# Altium PCB PCB6.PcbDoc
Units mm, origin at the board's own origin, x right, y up, seen from the top; angles counter-clockwise.
Board outline 25 x 40 mm, 2 copper layers (Top Layer, Bottom Layer); 23 components, 19 nets, 85 pads, 2 vias.
Unrouted connection lines stored in the file: 48.
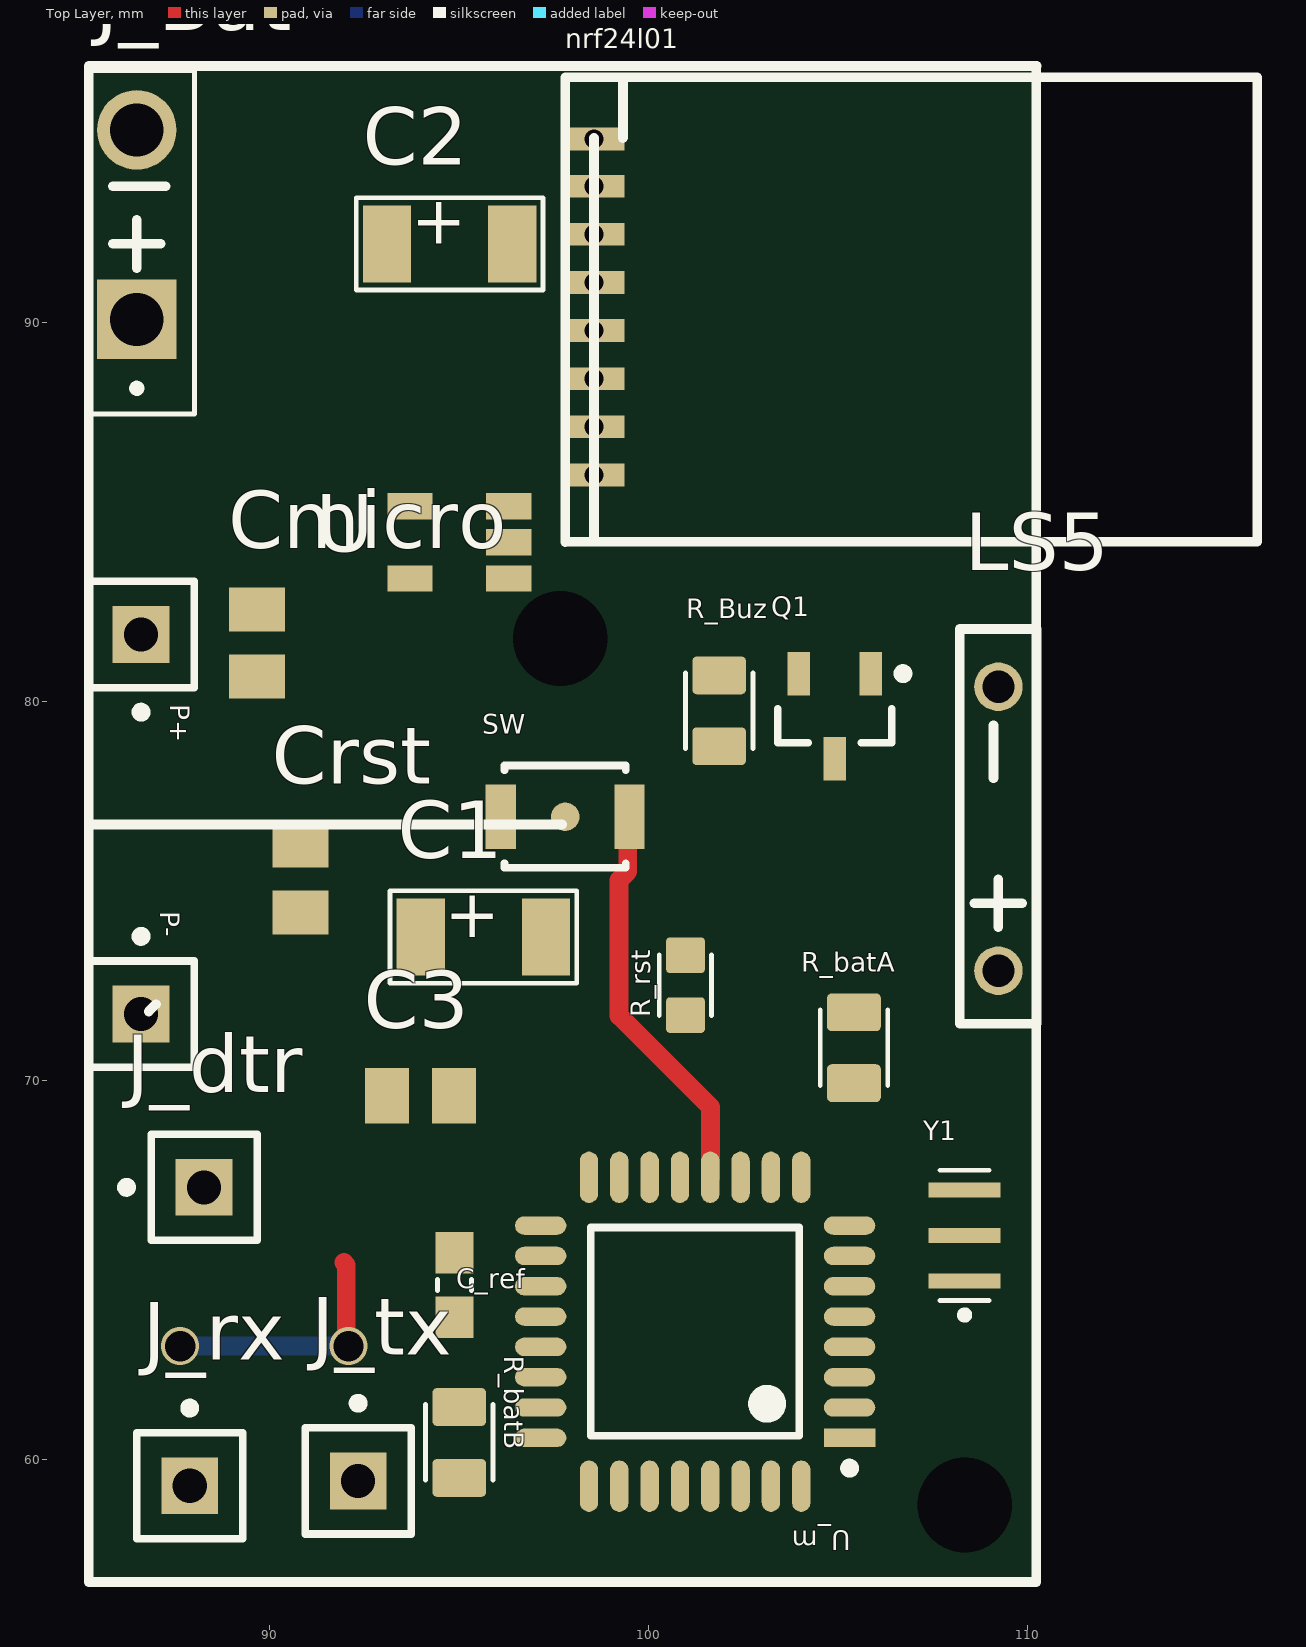
[diagram p0: Top Layer view]
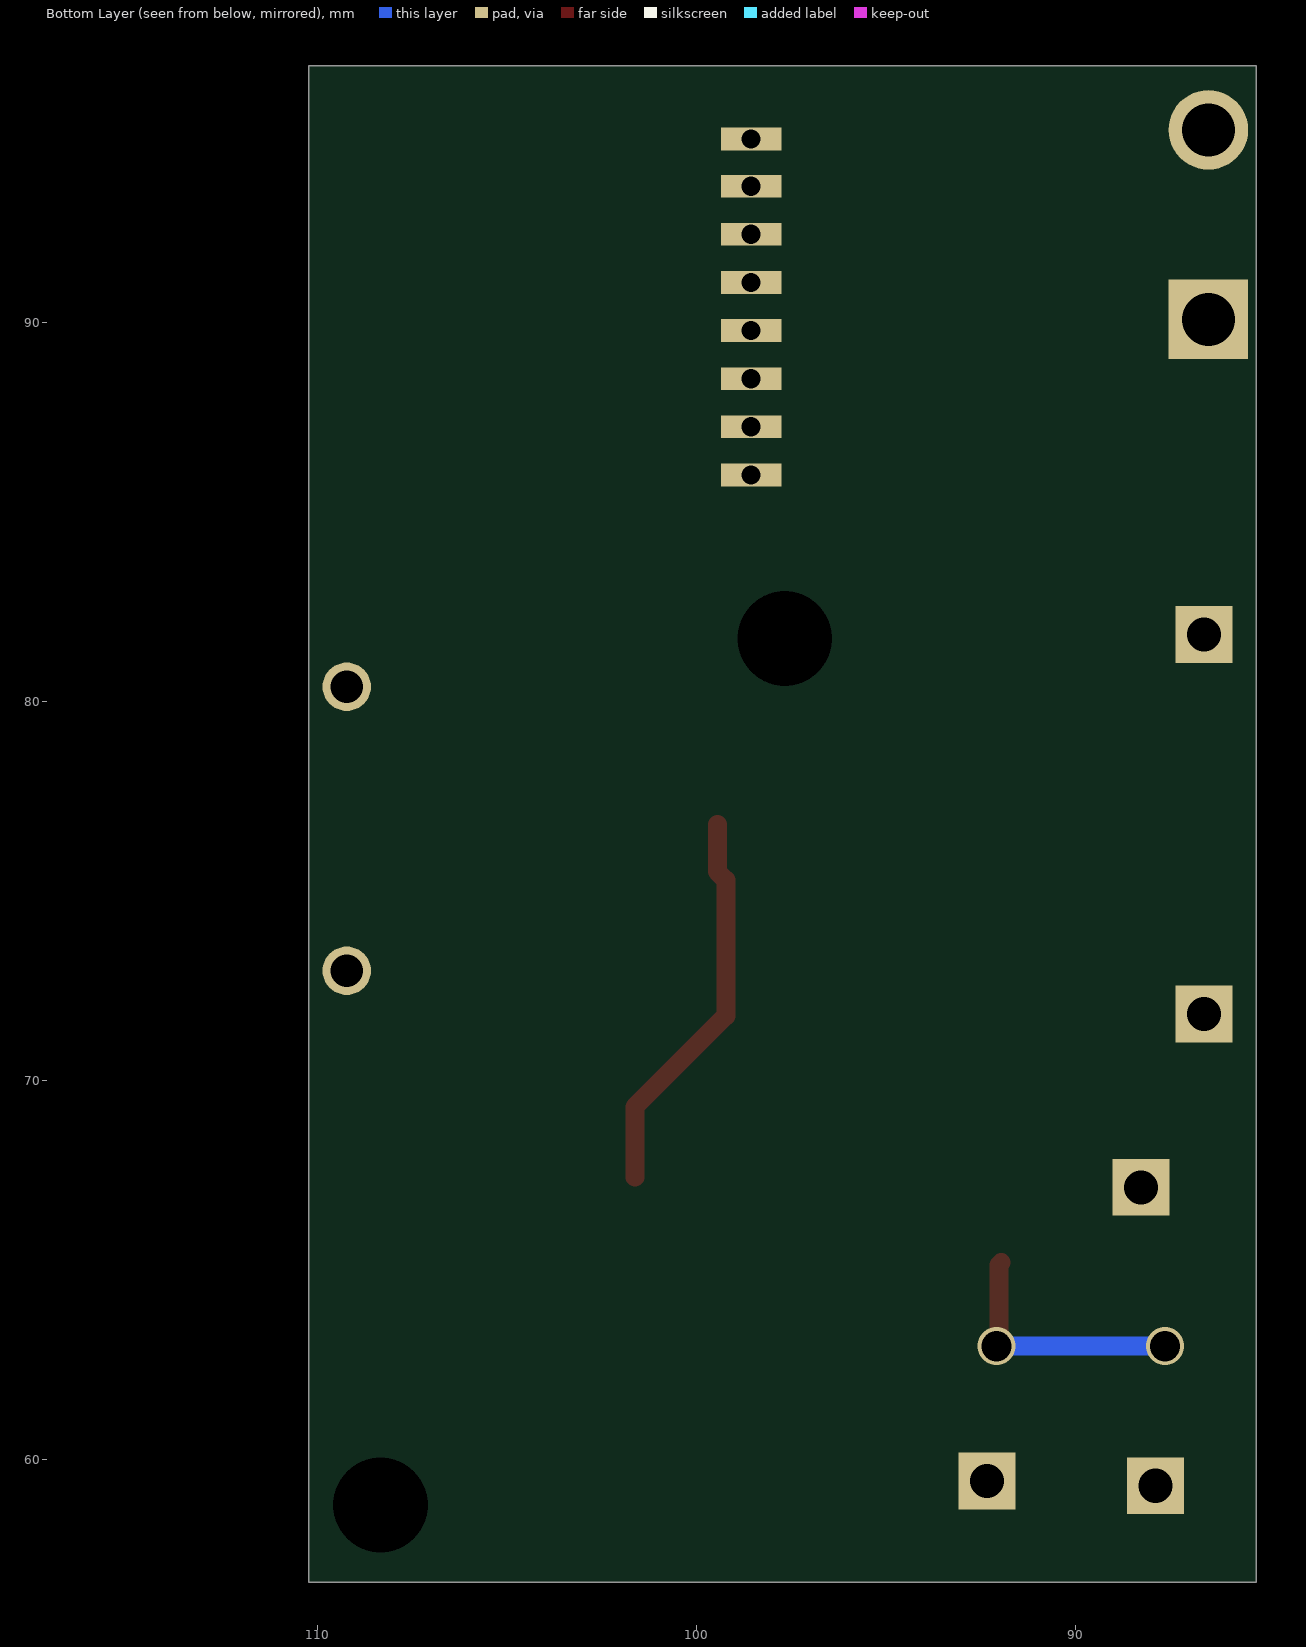
[diagram p1: Bottom Layer view, seen from below]

## Layer stack, top to bottom
Top Solder: solder mask 0.0102, Solder Resist, Dk 3.5
Top Layer: signal copper 0.0356
Dielectric 1: dielectric 0.32, FR-4, Dk 4.8
Bottom Layer: signal copper 0.0356
Bottom Solder: solder mask 0.0102, Solder Resist, Dk 3.5

## Board outline
85.217,56.769 85.217,96.769 110.217,96.769 110.217,56.769

## Design rules (kind name [scope] priority, off if disabled: settings)
Clearance [All] p1: gap=0.254 ignorepadtopadclearanceinfootprint=FALSE except(0: Arc-Hole Track-Hole SMDPad-Hole THPad-Hole Via-Hole Fill-Hole Poly-Hole Region-Hole Text-Hole)
PolygonConnect [All] p1: connectstyle=Relief reliefconductorwidth=0.254 reliefentries=4 polygonreliefangle="90 Angle" airgapwidth=0.254
RoutingVias [All] p1: holewidth=0.5 width=0.7 viastyle="Through Hole" minholewidth=0.8 minwidth=1 maxholewidth=0.5 maxwidth=0.8
SolderMaskExpansion [All] p1: expansion=0.102 istentingtop=FALSE
Width [All] p1: maxlimit=1 minlimit=0.254 preferedwidth=0.5
30 further rules are at their usual default settings.

## Components (designator, comment, footprint, x,y, rotation, side; value= is the part's Value field where it differs from the comment)
C1 "10uf" CT1206 95.631,73.787 r0 top
C2 "10uf" CT1206 94.742,92.075 r0 top
C3 "0.1uf" CAPC2012X94N 93.971,69.596 r0 top
C_ref "0.1uf" CAPC1608X90 94.869,64.604 r90 top
Cmicro "0.1uf" CAPC2012X94N 89.662,81.543 r90 top
Crst "0.1uf" CAPC2012X94N 90.805,75.32 r90 top
J_Bat "KF301-2P" HANDSON_KF301-2P 86.487,92.583 r90 top
J_dtr "Socket" PIN1 88.265,67.183 r90 top
J_rx "Socket" PIN1 87.884,59.309 r0 top
J_tx "Socket" PIN1 92.329,59.436 r0 top
LS5 "PS1240P02BT" XDCR_PS1240P02BT 109.093,76.835 r90 top
nrf24l01 "SMD" NRF24L01 97.79,94.869 r0 top
P+ "Plug" PIN1 86.6,81.769 r180 top
P- "Plug" PIN1 86.6,71.755 r0 top
Q1 "QNPN" SOT-23B_N 104.902,79.611 r270 top
R_batA "470 K" RESC2012X65N 105.41,70.866 r90 top
R_batB "1 M" RESC2012X65N 94.996,60.452 r90 top
R_Buz "100" RESC2012X65N 101.854,79.756 r90 top
R_rst "10K" RESC1608X50N 100.965,72.517 r270 top
SW "B3U-1000P-B" Omron_0_MFG 97.79,76.962 r0 top
U "3.3reg" SOT-23-5 94.996,84.201 r90 top
U_m "ATMEGA328PB-AUR" Microchip_C04-074_IPC_C 101.219,63.373 r180 top
Y1 "clock" OSC_CSTCE8M00G52-R0 108.331,65.913 r90 top

## Footprints (in the part's own frame and the unit in brackets; to place one, negate y for a bottom-side part, rotate by r counter-clockwise, add the part's x,y. Pads: shape width x height; smd on the part's side, far side on the other; paste and mask are expansions set on the pad)
CAPC1608X90 [mm]
  rect 1.1x1 smd: 1(-0.85,0) 2(0.85,0)
  silkscreen extent -0.15,-0.45 0.15,0.45, body extent -0.8,-0.45 0.8,0.45, height 0.79
CAPC2012X94N [mm]
  rect 1.16x1.47 smd: 1(-0.88,0) 2(0.88,0)
  body extent -0.8,-0.45 0.8,0.45, height 0.79
CT1206 [mil]
  rect 50x80 smd: NEG(65,0) POS(-65,0)
  silkscreen extent -97,-48 97,48, body extent -69,-28 65,35, height 67
HANDSON_KF301-2P [mm]
  rect 2.1x2.1 hole 1.4: 1(-2.5,0)
  round 2.1 hole 1.4: 2(2.5,0)
  silkscreen extent -5,-1.52 4.06,1.27
Microchip_C04-074_IPC_C [mm]
  rect 1.355x0.486 smd paste+0 mask+0: 1(-4.075,2.8)
  rrect100% 1.355x0.486 smd paste+0 mask+0: 2(-4.075,2) 3(-4.075,1.2) 4(-4.075,0.4) 5(-4.075,-0.4) 6(-4.075,-1.2) 7(-4.075,-2) 8(-4.075,-2.8) 17(4.075,-2.8) 18(4.075,-2) 19(4.075,-1.2) 20(4.075,-0.4) 21(4.075,0.4) 22(4.075,1.2) 23(4.075,2) 24(4.075,2.8)
  rrect100% 0.486x1.355 smd paste+0 mask+0: 9(-2.8,-4.075) 10(-2,-4.075) 11(-1.2,-4.075) 12(-0.4,-4.075) 13(0.4,-4.075) 14(1.2,-4.075) 15(2,-4.075) 16(2.8,-4.075) 25(2.8,4.075) 26(2,4.075) 27(1.2,4.075) 28(0.4,4.075) 29(-0.4,4.075) 30(-1.2,4.075) 31(-2,4.075) 32(-2.8,4.075)
  silkscreen extent -4.2,-2.75 2.75,3.72, body extent -4.5,-4.5 4.5,4.5, height 1
NRF24L01 [mil] "smd"
  rect 62.99x23.62 hole 20: 1(30,-1) 2(30,-49.99) 3(30,-100) 4(30,-150) 5(30,-200) 6(30,-250) 7(30,-300) 8(30,-350)
  silkscreen extent 0,-420 719,63, body extent -3,-412 706,60, height 32
Omron_0_MFG [mm]
  rect 0.8x1.7 smd paste+0 mask+0: 1(-1.7,0) 2(1.7,0)
  round 0.75 smd paste-1000 mask+0: ""(0,0)
  silkscreen extent -1.6,-1.35 1.6,1.35, body extent -2,-1.25 2,1.25, height 2.26
OSC_CSTCE8M00G52-R0 [mm]
  rect 0.4x1.9 smd: 1(-1.2,0) 2(0,0) 3(1.2,0)
  silkscreen extent -2.2,-0.65 1.72,0.65, body extent -1.6,-0.65 1.6,0.65, height 0.8
PIN1 [mm] "Connector; Plug"
  rect 1.5x1.5 hole 0.9: 1(0,0)
  silkscreen extent -1.4,-1.4 1.4,2.17
RESC1608X50N [mm]
  rrect20% 0.94x1.02 smd: 1(-0.79,0) 2(0.79,0)
  silkscreen extent -0.8,-0.69 0.8,0.69, body extent -0.78,-0.43 0.78,0.43, height 0.49
RESC2012X65N [mm]
  rrect25% 1x1.42 smd: 1(-0.935,0) 2(0.935,0)
  silkscreen extent -1,-0.89 1,0.89, body extent -1,-0.62 1,0.62, height 0.6
SOT-23-5 [mm]
  rect 0.69x1.2 smd: 1(-0.95,-1.3) 2(0,-1.3) 3(0.95,-1.3) 4(0.95,1.3) 5(-0.95,1.3)
  body extent -1.38,-1.48 1.52,1.22, height 1.45
SOT-23B_N [mm] "SOT23, 3-Leads, Body 2.9x1.3mm, Pitch 0.95mm, Lead Span 2.4mm, IPC Medium Density"
  rect 1.15x0.6 smd: 1(-1.125,0.95) 2(-1.125,-0.95) 3(1.125,0)
  silkscreen extent -1.25,-1.5 0.7,1.93, body extent -0.7,-1.5 0.7,1.5, height 1.14
XDCR_PS1240P02BT [mm]
  round 1.28 hole 0.85: 1(-3.937,-0.127) 2(3.556,-0.127)
  silkscreen extent -5.33,-1.14 5.08,0.89, body extent -6.13,-15.3 5.87,-3.3

## Part data
C1 C2: library part TANTALUM-SMD-10UF-20V-20%(1206), "10ÂµF Molded Tantalum Capacitors 20V 1206 _3216 Metric_ 5Ohm", Package="1206 Kemet", Availability=Unavailable, MF=KEMET, MP=T491A106M020AT, Price=None, SnapEDA_Link=https://www.snapeda.com/parts/T491A106M020AT/KEMET/view-part/104616/?ref=snap
C3 Cmicro Crst: library part 0805YC103J4T2A, "10000pF Â±5% 16V Ceramic Capacitor X7R 0805 _2012 Metric_", Package="2012 AVX", Availability=Unavailable, MF=AVX, MP=0805YC103J4T2A, Price=None, SnapEDA_Link=https://www.snapeda.com/parts/0805YC103J4T2A/AVX/view-part/606803/?ref=snap
C_ref: library part CC0603KRX7R9BB104, "0.1ÂµF Â±10% 50V Ceramic Capacitor X7R 0603 _1608 Metric_", Package="0603 Yageo", Digi-Key_Part_Number=311-1344-1-ND, Digi-Key_Purchase_URL=https://www.digikey.com/product-detail/en/yageo/CC0603KRX7R9BB104/311-1344-1-ND/2103128?utm_source=snapeda&utm_medium=aggregator&utm_campaign=symbol, MF=Yageo, MP=CC0603KRX7R9BB104, SnapEDA_Link=https://www.snapeda.com/parts/CC0603KRX7R9BB104/Yageo/view-part/78680/?ref=snap
J_Bat: "2 Pin Terminal Block 5mm Pitch", Package=Package, Availability=Unavailable, MF="Handson Technology", MP=KF301-2P, Price=None, SnapEDA_Link=https://www.snapeda.com/parts/KF301-2P/Handson%20Technology/view-part/4276957/?ref=snap
LS5: "Buzzers Transducer, Externally Driven Piezo 3V 4kHz 60dB @ 3V, 10cm Through Hole PC Pins", Package="2020 TDK", Availability=Unavailable, MF=TDK, MP=PS1240P02BT, Price=None, SnapEDA_Link=https://www.snapeda.com/parts/PS1240P02BT/TDK/view-part/53420/?ref=snap
nrf24l01: library part nrf24l01_smd, Supplier Part Number 1=311-0.0ERCT-ND, Supplier 1=Digi-Key
Q1: "NPN Bipolar Transistor", LatestRevisionDate=29-May-2009, LatestRevisionNote="IPC-7351 Footprint Added.", PackageDescription="3-Pin SOT-23 Package 0.95 mm Pitch, 2.4 mm Lead Span", PackageReference=SOT-23B, PackageVersion=Aug-1999, Published=8-Jun-2000, Publisher="Altium Limited"
R_batA R_batB R_Buz: library part 2-2176053-0, "RES 0.33 OHM 1% 1/4W 0805", Package=0805, Power_Rating=".25 W", Resistance=.33, Tolerance=1%, Availability=Unavailable, EU_RoHS_Compliance="Compliant with Exemptions", MF="TE Connectivity", MP=2-2176053-0, Price=None, SnapEDA_Link=https://www.snapeda.com/parts/2-2176053-0/TE%20Connectivity/view-part/2214508/?ref=snap
R_rst: library part RP73D1J13RBTDG, "Res, Thin Film, 13r, 0.1%, 0.1w, 0603", Package="0603 TE Connectivity / AMP", Availability=Unavailable, MF="TE Connectivity", MP=RP73D1J13RBTDG, Price=None, SnapEDA_Link=https://www.snapeda.com/parts/RP73D1J13RBTDG/TE%20Connectivity/view-part/970906/?ref=snap, TE_purchase_URL=https://www.te.com/usa-en/product-RP73D1J13RBTDG.html?te_bu=Cor&te_type=disp&te_campaign=seda_glo_cor-seda-global-disp-prtnr-fy19-seda-model-bom-cta_sma-317_1&elqCampaignId=32493
U: library part PMIC-MIC5205-3.3YMSTR(SOT23-5), "Linear Voltage Regulator IC 1 Output 150mA SOT-23-5", Package="SOT-23-5 Microchip", Digi-Key_Part_Number=576-1259-1-ND, Digi-Key_Purchase_URL=https://www.digikey.in/product-detail/en/microchip-technology/MIC5205-3.3YM5-TR/576-1259-1-ND/771886?utm_source=snapeda&utm_medium=aggregator&utm_campaign=symbol, MF=Microchip, MP=MIC5205-3.3YM5-TR, SnapEDA_Link=https://www.snapeda.com/parts/MIC5205-3.3YM5-TR/Microchip/view-part/424295/?ref=snap
Y1: library part CSTCE8M00G52-R0, "8MHz Ceramic Resonator Built in Capacitor 10pF Â±0.2% -20Â°C ~ 80Â°C Surface Mount", Package="Surface Mount Murata Electronics North America", Availability=Bad, Check_prices=https://www.snapeda.com/parts/CSTCE8M00G52-R0/Murata%20Electronics%20North%20America/view-part/234504/?ref=eda, MF=Murata, MP=CSTCE8M00G52-R0, Price=None, SnapEDA_Link=https://www.snapeda.com/parts/CSTCE8M00G52-R0/Murata%20Electronics%20North%20America/view-part/234504/?ref=snap
J_dtr J_rx J_tx P+ P-: LatestRevisionDate=17-Jul-2002, LatestRevisionNote="Re-released for DXP Platform.", Publisher="Altium Limited"

## Free pads (board coordinates)
  round 0 hole 2.5 unplated paste-1000 mask+0: 13(97.663,81.661) 13(108.331,58.801)

## Via types
v1: diameter 1, hole 0.8, Top Layer to Bottom Layer, 2 vias

## Nets (pads, with @x,y where several pads share a name; then routed paths per layer and width w, separated by ;. In a path a pad name is that pad's centre, name@x,y a point inside that pad or via, vN(x,y) a via of type N, cw(c..) or ccw(c..) an arc to the next point about the centre after c; other vN are vias at no path point)
3v3: C2.POS C3.2 Cmicro.2 LS5.1 nrf24l01.1 R_rst.1 U.5 U_m.4 U_m.6 U_m.18
GND: C1.NEG C2.NEG C3.1 C_ref.2 Cmicro.1 J_Bat.2 nrf24l01.2 P-.1 Q1.3 R_batB.1 SW.1 U.2 U_m.3 U_m.5 U_m.21 Y1.2
NetC1_POS: C1.POS J_Bat.1 P+.1 R_batA.2 U.1 U.3
NetC_ref_1: C_ref.1 U_m.20
NetCrst_1: Crst.1 J_dtr.1
NetCrst_2: Crst.2 R_rst.2 SW.2 U_m.29
NetJ_rx_1: J_rx.1 U_m.31
NetJ_tx_1: J_tx.1 U_m.30
NetLS5_2: LS5.2 Q1.1
Netnrf24l01_3: nrf24l01.3 U_m.13
Netnrf24l01_4: nrf24l01.4 U_m.14
Netnrf24l01_5: nrf24l01.5 U_m.17
Netnrf24l01_6: nrf24l01.6 U_m.15
Netnrf24l01_7: nrf24l01.7 U_m.16
NetQ1_2: Q1.2 R_Buz.2
NetR_batA_1: R_batA.1 R_batB.2 U_m.23
NetR_Buz_1: R_Buz.1 U_m.1
NetU_m_7: U_m.7 Y1.1
NetU_m_8: U_m.8 Y1.3
pads on no net: nrf24l01.8 SW. U.4 U_m.2 U_m.9 U_m.10 U_m.11 U_m.12 U_m.19 U_m.22 U_m.24 U_m.25 U_m.26 U_m.27 U_m.28 U_m.32
copper on no net: | length 17.1
  Top Layer w0.5: 91.952,65.194 92.014,65.132 92.014,63.053 v1(92.075,62.992) ; 99.441,76.76 99.441,75.512 99.215,75.286 99.215,74.041 99.215,71.708 101.619,69.304 101.619,67.448
  Bottom Layer w0.5: v1(87.63,62.992) v1(92.075,62.992)

## Polygon pours and split planes (outlines as drawn)
GND on Top Layer "GND_L01_P001" (solid, pour order 1): 46.703,94.929 71.717,94.929 71.717,54.943 71.703,54.929 46.703,54.929

## Silkscreen, mask and mechanical layers (free items; w line width, h text height)
Top Overlay:
  lines w0.254: 85.217,76.755 97.717,76.755 ; 86.802,71.821 86.995,72.014 ; 110.217,96.769 110.217,56.769 85.217,56.769 85.217,96.769 110.231,96.769

## Text inside footprints (layer, text, board x,y; h text height)
C1: Top Overlay "+" at 94.615,73.787 h1.27
C2: Top Overlay "+" at 93.726,92.075 h1.27